# EAGLE board PCM63 (EAGLE 4.11)
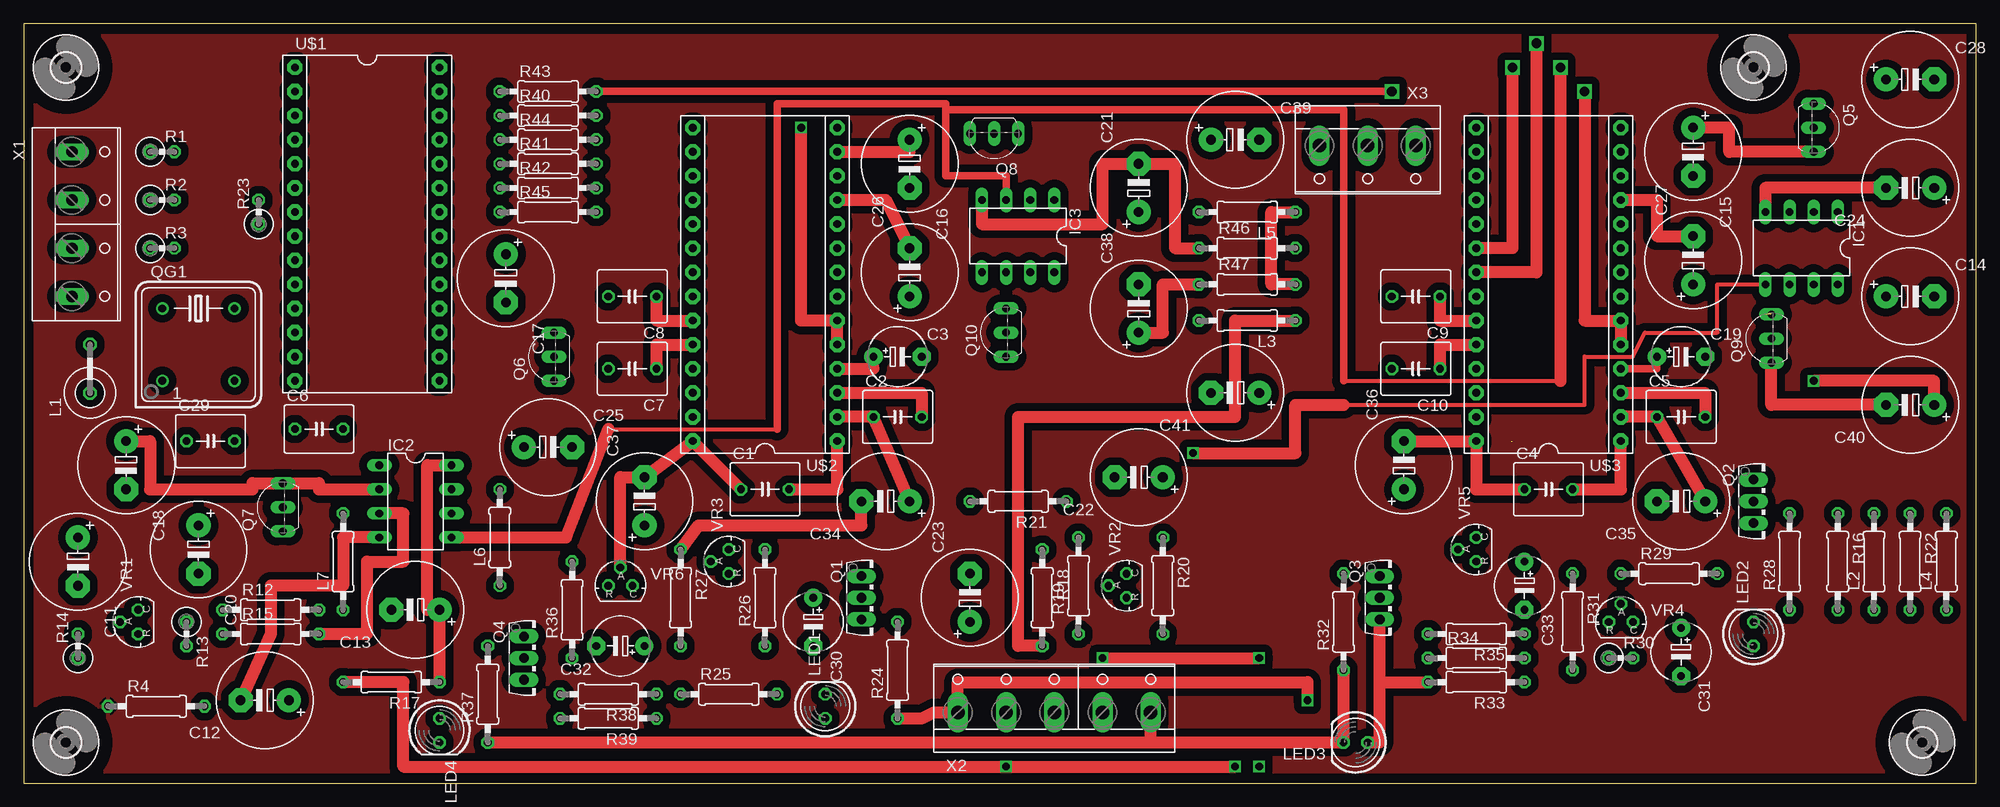
[diagram p0: board, top side]
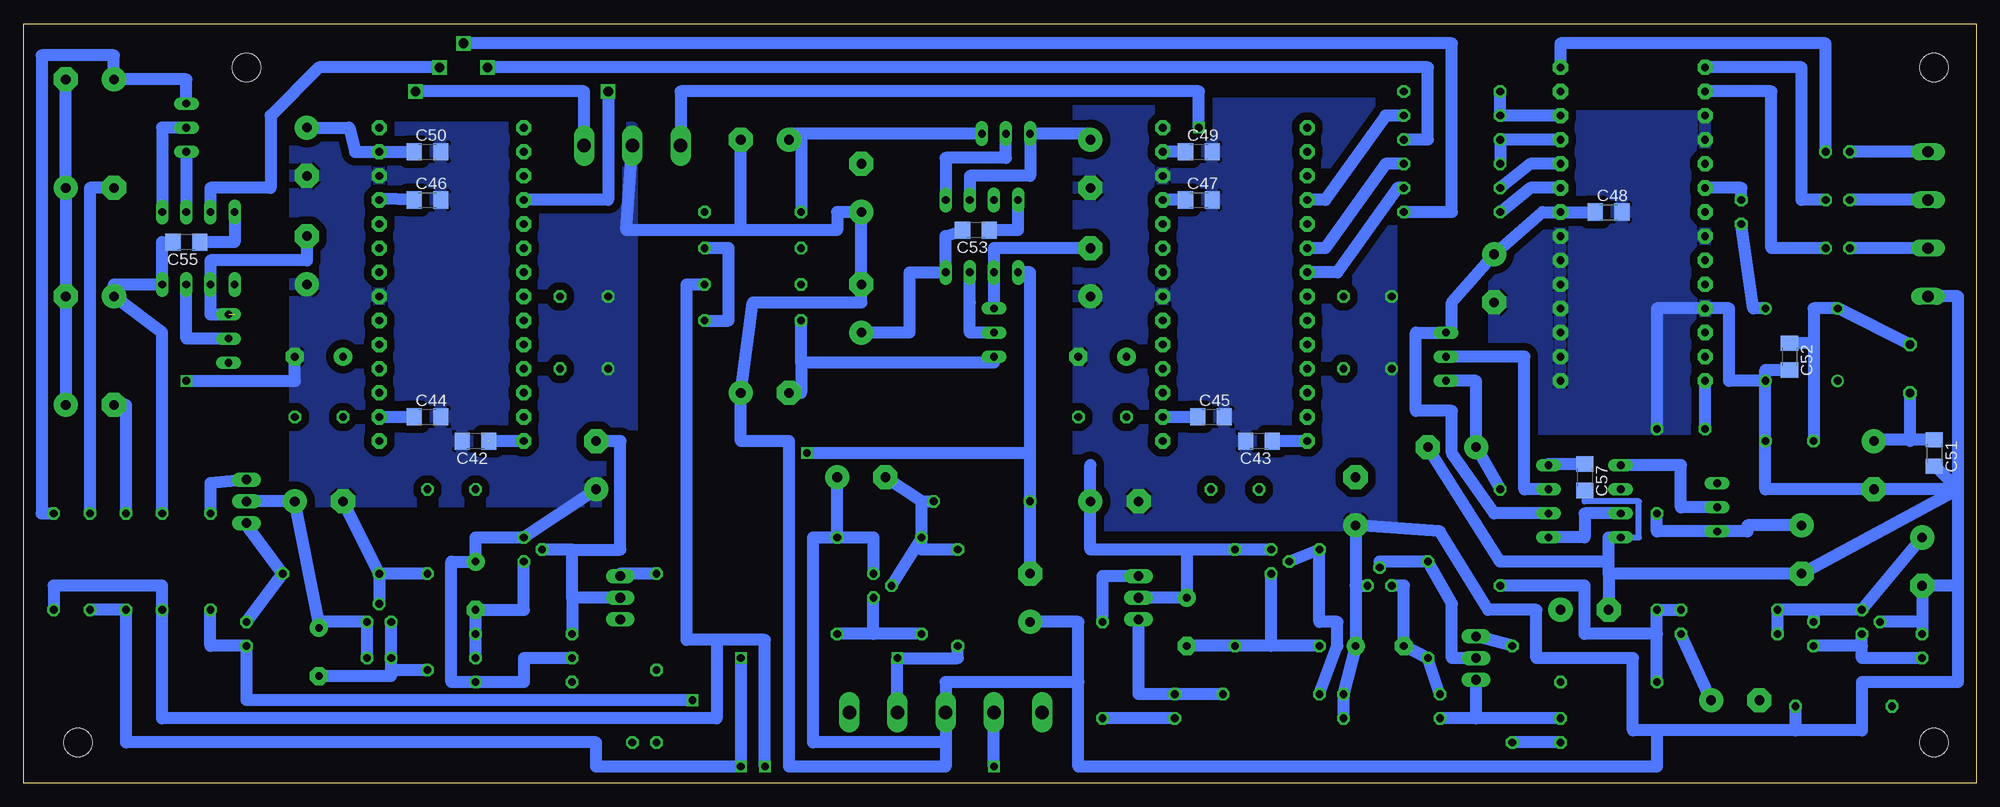
[diagram p1: board, bottom side, seen from below]

Size 205.72 x 80 mm. Coordinates in mm from the lower left corner, seen from the top.
Outline: 0,0 205.72,0 205.72,80 0,80 0,0
Copper layers (1*16): Top 0.035mm / dielectric 1.5mm / Bottom 0.035mm
Design rules "default": minimum track width 10mil, minimum drill 24mil, track to track 8mil, track to pad 8mil, pad to pad 8mil, via to via 8mil, smd to smd 8mil, copper to edge 40mil, drill to drill 8mil, minimum pad ring 10mil, minimum via ring 8mil, stop-mask expansion 4mil, vias tented up to drill 0mil, thermal gap 10mil

## Footprints (pad centres in the part's own frame; a part is rotated, then mirrored left to right if it is on the bottom)
C050-055X075 = drill 0.813 octagon: 1 -2.54,0; 2 2.54,0
E5-6 = drill 0.813 pad 1.905 round: + -2.54,0 | drill 0.813 pad 1.905 octagon: - 2.54,0
C050-050X075 = drill 0.813 octagon: 1 -2.54,0; 2 2.54,0
E5-10,5 = drill 1.016 pad 2.54 round: + -2.54,0 | drill 1.016 pad 2.54 octagon: - 2.54,0
C1206 = smd 1.6 x 1.8: 1 -1.4,0; 2 1.4,0
3,0 = hole 3: 0,0
DIL08 = drill 0.813 long: 1 -3.81,-3.81; 2 -1.27,-3.81; 3 1.27,-3.81; 4 3.81,-3.81; 5 3.81,3.81; 6 1.27,3.81; 7 -1.27,3.81; 8 -3.81,3.81
LBC-SE = drill 0.914 octagon: 1 -2.54,0; 2 2.54,0
0207/10 = drill 0.813 octagon: 1 -5.08,0; 2 5.08,0
LED5MM = drill 0.813 octagon: A -1.27,0; K 1.27,0
TO126AV = drill 1.016 long: B 2.286,-1.27; C 0,-1.27; E -2.286,-1.27
TO92-EBC = drill 0.813 long: B 0,-1.27; C -2.54,-1.27; E 2.54,-1.27
DIL08S = drill 0.813 round: 1 -3.81,-3.81; 4 3.81,-3.81; 5 3.81,3.81; 8 -3.81,3.81
0309V = drill 0.813 octagon: 1 -1.27,0; 2 1.27,0
DIL28 = drill 0.813 pad 1.6 octagon: 1 -16.51,-7.62; 2 -13.97,-7.62; 3 -11.43,-7.62; 4 -8.89,-7.62; 5 -6.35,-7.62; 6 -3.81,-7.62; 7 -1.27,-7.62; 8 1.27,-7.62; 9 3.81,-7.62; 10 6.35,-7.62; 11 8.89,-7.62; 12 11.43,-7.62; 13 13.97,-7.62; 14 16.51,-7.62; 15 16.51,7.62; 16 13.97,7.62; 17 11.43,7.62; 18 8.89,7.62; 19 6.35,7.62; 20 3.81,7.62; 21 1.27,7.62; 22 -1.27,7.62; 23 -3.81,7.62; 24 -6.35,7.62; 25 -8.89,7.62; 26 -11.43,7.62; 27 -13.97,7.62; 28 -16.51,7.62
TO92-CLP = drill 0.813 octagon: A 0,1.905; C 1.27,0; R -1.27,0
W237-4P = drill 1.194 long: 1 -7.62,-0.635; 2 -2.54,-0.635; 3 2.54,-0.635; 4 7.62,-0.635
W237-5P = drill 1.422 long: 1 -10.16,-0.635; 2 -5.08,-0.635; 3 0,-0.635; 4 5.08,-0.635; 5 10.16,-0.635
W237-3E = drill 1.422 long: 1 -5.08,-0.635; 2 0,-0.635; 3 5.08,-0.635

## Placement (x,y rotation side)
C1  470nF  [C050-055X075]  78.1,30.95 0 top
C2  470nF  [C050-055X075]  92.07,38.57 0 top
C3  100uF  [E5-6]  92.07,44.92 0 top
C4  470nF  [C050-055X075]  160.65,30.95 0 top
C5  470nF  [C050-055X075]  174.62,38.57 0 top
C6  100nF  [C050-050X075]  31.11,37.3 0 top
C7  100nF  [C050-055X075]  64.13,43.65 180 top
C8  100nF  [C050-055X075]  64.13,51.27 180 top
C9  100nf  [C050-055X075]  146.68,51.27 180 top
C10  100nf  [C050-055X075]  146.68,43.65 180 top
C11  100uF  [E5-10,5]  5.71,23.33 270 top
C12  100uF  [E5-10,5]  25.39,8.73 180 top
C13  100uF  [E5-10,5]  41.27,18.25 180 top
C14  100uF  [E5-10,5]  198.75,51.27 0 top
C15  100uF  [E5-10,5]  175.89,66.51 270 top
C16  100uF  [E5-10,5]  93.34,65.24 270 top
C17  100nF  [E5-10,5]  50.8,53.17 270 top
C18  100uF  [E5-10,5]  10.79,33.49 270 top
C19  100uF  [E5-6]  174.62,44.92 0 top
C20  100uF  [E5-10,5]  18.41,24.6 270 top
C21  100uF  [E5-10,5]  117.47,62.7 90 top
C22  100uF  [E5-10,5]  117.47,32.22 180 top
C23  100uF  [E5-10,5]  99.69,19.52 90 top
C24  100uF  [E5-10,5]  198.75,62.7 180 top
C25  100uF  [E5-10,5]  55.24,35.39 0 top
C26  100uF  [E5-10,5]  93.34,53.81 90 top
C27  100uF  [E5-10,5]  175.89,55.08 90 top
C28  100uF  [E5-10,5]  198.75,74.13 0 top
C29  100nF  [C050-055X075]  19.68,36.03 0 top
C30  22uF  [E5-6]  83.18,16.98 270 top
C31  22uF  [E5-6]  174.62,13.81 270 top
C32  22uF  [E5-6]  62.86,14.44 180 top
C33  22uF  [E5-6]  158.11,20.79 270 top
C34  100uF  [E5-10,5]  90.8,29.68 180 top
C35  100uF  [E5-10,5]  174.62,29.68 180 top
C36  100uF  [E5-10,5]  145.41,33.49 90 top
C37  100uF  [E5-10,5]  65.4,29.68 90 top
C38  100uF  [E5-10,5]  117.47,50 90 top
C39  100uF  [E5-10,5]  127.63,67.78 0 top
C40  100uF  [E5-10,5]  198.75,39.84 180 top
C41  100uF  [E5-10,5]  127.63,41.11 180 top
C42  4.7uF  [C1206]  158.11,36.03 180 bottom
C43  4.7uF  [C1206]  75.56,36.03 180 bottom
C44  4.7uF  [C1206]  163.19,38.57 0 bottom
C45  4.7uF  [C1206]  80.64,38.57 0 bottom
C46  4.7uF  [C1206]  163.19,61.43 0 bottom
C47  4.7uF  [C1206]  81.91,61.43 0 bottom
C48  4.7uF  [C1206]  38.73,60.16 0 bottom
C49  4.7uF  [C1206]  81.91,66.51 0 bottom
C50  4.7uF  [C1206]  163.19,66.51 0 bottom
C51  4.7uF  [C1206]  4.44,34.76 270 bottom
C52  4.7uF  [C1206]  19.68,44.92 270 bottom
C53  4.7uF  [C1206]  105.41,58.25 180 bottom
C55  4.7uF  [C1206]  188.59,56.98 180 bottom
C57  4.7uF  [C1206]  41.27,32.22 270 bottom
H1  MOUNT-HOLE3.0  [3,0]  4.44,75.4 0 top
H2  MOUNT-HOLE3.0  [3,0]  182.24,75.4 0 top
H3  MOUNT-HOLE3.0  [3,0]  200.02,4.28 0 top
H4  MOUNT-HOLE3.0  [3,0]  4.44,4.28 0 top
IC1  OPA2604  [DIL08]  187.32,56.35 180 top
IC2  OPA2604  [DIL08]  41.27,29.68 270 top
IC3  OPA2604  [DIL08]  104.77,57.62 180 top
L1  LBC-SE  [LBC-SE]  6.98,43.65 90 top
L2  2.2mH  [0207/10]  194.94,23.33 90 top
L3  2.2mH  [0207/10]  128.9,48.73 180 top
L4  2.2mH  [0207/10]  202.56,23.33 90 top
L5  2.2mH  [0207/10]  128.9,60.16 180 top
L6  2.2mH  [0207/10]  50.16,25.87 90 top
L7  2.2mH  [0207/10]  33.65,23.33 90 top
LED1  [LED5MM]  84.45,8.09 90 top
LED2  [LED5MM]  182.24,15.71 90 top
LED3  [LED5MM]  140.33,4.28 180 top
LED4  [LED5MM]  43.81,5.55 270 top
Q1  BD140  [TO126AV]  89.53,19.52 270 top
Q2  BD140  [TO126AV]  183.51,29.68 270 top
Q3  BD139  [TO126AV]  144.14,19.52 270 top
Q4  BD139  [TO126AV]  53.97,13.17 270 top
Q5  BC550C  [TO92-EBC]  189.86,69.05 270 top
Q6  BC550C  [TO92-EBC]  54.61,44.92 90 top
Q7  BC550C  [TO92-EBC]  26.03,29.04 90 top
Q8  BC550C  [TO92-EBC]  102.23,67.14 180 top
Q9  BC560  [TO92-EBC]  182.88,46.82 90 top
Q10  BC560  [TO92-EBC]  102.23,47.46 90 top
QG1  11.2896Mhz  [DIL08S]  18.41,46.19 0 top
R1  47  [0309V]  14.6,66.51 0 top
R2  47  [0309V]  14.6,61.43 0 top
R3  47  [0309V]  14.6,56.35 0 top
R4  0  [0207/10]  13.97,8.09 0 top
R12  220  [0207/10]  26.03,18.25 0 top
R13  1k  [0309V]  17.14,15.71 270 top
R14  1k  [0309V]  5.71,14.44 90 top
R15  470  [0207/10]  26.03,15.71 0 top
R16  100  [0207/10]  191.13,23.33 270 top
R17  100  [0207/10]  38.73,10.63 180 top
R18  220  [0207/10]  107.31,19.52 270 top
R19  1k  [0207/10]  111.12,20.79 90 top
R20  1k  [0207/10]  120.01,20.79 270 top
R21  470  [0207/10]  104.77,29.68 180 top
R22  100  [0207/10]  198.75,23.33 270 top
R23  47  [0309V]  24.76,60.16 90 top
R24  20  [0207/10]  92.07,11.9 90 top
R25  470  [0207/10]  74.29,9.36 0 top
R26  1k  [0207/10]  78.1,19.52 90 top
R27  1k  [0207/10]  69.21,19.52 270 top
R28  20  [0207/10]  186.05,23.33 90 top
R29  470  [0207/10]  173.35,22.06 0 top
R30  1k  [0309V]  168.27,13.17 0 top
R31  1k  [0207/10]  163.19,16.98 270 top
R32  20  [0207/10]  139.06,16.98 90 top
R33  470  [0207/10]  153.03,10.63 180 top
R34  1k  [0207/10]  153.03,13.17 0 top
R35  1k  [0207/10]  153.03,15.71 180 top
R36  1k  [0207/10]  57.78,18.25 90 top
R37  20  [0207/10]  48.89,9.36 90 top
R38  1k  [0207/10]  61.59,9.36 180 top
R39  470  [0207/10]  61.59,6.82 180 top
R40  47  [0207/10]  55.24,70.32 0 top
R41  47  [0207/10]  55.24,65.24 0 top
R42  47  [0207/10]  55.24,62.7 0 top
R43  47  [0207/10]  55.24,72.86 0 top
R44  47  [0207/10]  55.24,67.78 0 top
R45  47  [0207/10]  55.24,60.16 0 top
R46  100  [0207/10]  128.9,56.35 0 top
R47  100  [0207/10]  128.9,52.54 0 top
U$1  SM5842  [DIL28]  36.19,58.89 270 top
U$2  PCM63  [DIL28]  78.1,52.54 90 top
U$3  PCM63  [DIL28]  160.65,52.54 90 top
VR1  [TO92-CLP]  12.06,16.98 90 top
VR2  [TO92-CLP]  116.2,20.79 90 top
VR3  [TO92-CLP]  74.29,23.33 90 top
VR4  [TO92-CLP]  168.27,16.98 0 top
VR5  [TO92-CLP]  153.03,24.6 90 top
VR6  [TO92-CLP]  62.86,20.79 0 top
X1  [W237-4P]  5.71,58.89 270 top
X2  [W237-5P]  108.58,8.09 0 top
X3  [W237-3E]  141.6,66.51 180 top

## Library data of the parts
C1-C53 C55 C57 L2-L7 R1-R4 R12-R47 = rcl
H1-H4 = holes
IC1-IC3 = linear
L1 = inductors
LED1-LED4 = led
Q1-Q4 = transistor-power
Q5-Q8 = transistor-npn
Q9 Q10 = transistor-pnp
QG1 = crystal
U$1-U$3 = burr-brown
VR1-VR6 = v-reg
X1-X3 = con-wago-508

## Nets
+5V: C12.+ IC1.3 IC2.3 IC2.5 IC3.3 R15.2
+5V/1: C15.+ C50.1 IC1.2 Q5.E U$3.13
+5V/2: C16.+ C49.1 IC3.2 Q8.E U$2.13
+5V/3: C17.+ C48.1 IC2.6 Q6.E U$1.22
+5V/4: C29.1 C52.1 L1.2 QG1.8
-5V: C23.- IC1.5 IC3.5 R21.2
DGND: R4.1
GND: C3.- C6.2 C7.2 C8.2 C9.2 C10.2 C11.- C12.- C13.- C14.- C15.- C16.- C17.- C18.- C19.- C20.- C21.+ C22.+ C23.+ C24.+ C25.- C26.+ C27.+ C28.- C29.2 C32.+ C33.+ C34.- C35.- C36.+ C37.+ C38.- C39.- C40.+ C41.+ C42.2 C43.2 C44.2 C45.2 C46.2 C47.2 C48.2 C49.2 C50.2 C51.2 C52.2 C57.2 IC2.4 QG1.4 R4.2 R14.2 R20.1 R25.1 R27.1 R29.1 R31.1 R33.1 R34.1 R38.1 R39.1 U$1.3 U$1.4 U$1.8 U$1.11 U$1.15 U$1.16 U$1.17 U$1.18 U$1.19 U$1.20 U$1.21 U$2.7 U$2.12 U$3.7 U$3.12 VR1.A VR2.C VR3.A VR4.A VR5.C VR6.C X1.4 X2.3 X3.2
N$1: R40.1 R43.1 U$1.26
N$2: R41.1 R44.1 U$1.25
N$3: R42.1 U$1.24
N$4: R45.1 U$1.23
N$5: C4.1 C36.- C42.1 Q3.C R35.2 U$3.28 VR5.A
N$6: C4.2 U$3.1
N$7: C5.2 U$3.3
N$8: C19.+ U$3.4
N$9: C3.+ U$2.4
N$10: C2.2 U$2.3
N$11: C1.2 U$2.1
N$12: C1.1 C37.- C43.1 Q4.C R36.2 U$2.28 VR6.A
N$13: C2.1 C30.+ C34.+ C45.1 Q1.C R26.2 U$2.2 VR3.C
N$14: C5.1 C31.+ C35.+ C44.1 Q2.C R30.2 U$3.2 VR4.C
N$15: C22.- R18.1 R19.2 R21.1 VR2.A
N$16: R1.2 U$1.28
N$17: R2.2 U$1.1
N$18: R3.2 U$1.2
N$19: R1.1 X1.1
N$20: R2.1 X1.2
N$21: R3.1 X1.3
N$22: R23.2 U$1.6
N$23: C20.+ L7.2 Q7.C
N$24: C6.1 U$1.14
N$25: C25.+ L6.2 Q6.C
N$26: C39.+ L5.2 Q8.C
N$27: C10.1 U$3.24
N$28: C8.1 U$2.23
N$29: C7.1 U$2.24
N$30: C28.+ L4.2 Q5.C
N$31: C41.- L3.2 Q10.C
N$32: C40.- L2.2 Q9.C
N$33: C9.1 U$3.23
N$36: U$2.5 U$2.6 X3.3
N$37: U$3.5 U$3.6 X3.1
N$38: R13.2 R14.1 VR1.R
N$39: C11.+ R12.1 R13.1 R15.1 VR1.C
N$40: R19.1 R20.2 VR2.R
N$41: IC3.7 Q10.B
N$42: C13.+ C57.1 IC2.8 R17.1
N$43: C27.- C46.1 IC1.6 Q9.E U$3.11
N$44: C14.+ C55.2 IC1.8 R16.1
N$45: IC1.1 Q5.B
N$46: C24.- C55.1 IC1.4 R22.1
N$47: IC1.7 Q9.B
N$48: C26.- C47.1 IC3.6 Q10.E U$2.11
N$49: IC3.1 Q8.B
N$50: QG1.5 R23.1
N$51: IC2.7 Q6.B
N$52: C18.+ C51.1 IC2.2 L1.1 Q7.E
N$53: Q1.E R24.2
N$54: IC2.1 Q7.B
N$55: LED1.K Q1.B R25.2
N$56: Q2.E R28.2
N$57: C30.- R26.1 R27.2 VR3.R
N$58: Q3.E R32.2
N$59: LED2.K Q2.B R29.2
N$60: LED3.A Q3.B R33.2
N$61: C31.- R30.1 R31.2 VR4.R
N$62: Q4.E R37.2
N$63: C33.- R34.2 R35.1 VR5.R
N$64: LED4.A Q4.B R39.2
N$65: R40.2 U$2.18
N$66: C32.- R36.1 R38.2 VR6.R
N$67: R41.2 U$2.20
N$68: R42.2 U$2.21
N$69: R43.2 U$3.18
N$70: R44.2 U$3.20
N$71: R45.2 U$3.21
N$72: C38.+ C53.2 IC3.8 R47.1
N$73: C21.- C53.1 IC3.4 R46.1
V+: LED1.A LED2.A R24.1 R28.1 X2.1
V-: LED3.K LED4.K R32.1 R37.1 X2.5
VDD: L4.1 L5.1 L6.1 L7.1 R12.2 R16.2 R17.2 R47.2 X2.2
VEE: L2.1 L3.1 R18.2 R22.2 R46.2 X2.4

## Tracks (layer width: path | path; a pad name or v marks a point on that pad's centre or on a via)
+5V  (via drill 1.02)
  Top 0.406: 61.59,37.3 79.37,37.3 | 139.06,42.38 161.92,42.38
  Top 0.813: 79.37,37.3 79.37,71.59 97.15,71.59 97.15,70.95 | IC3.3 103.5,63.97 97.15,63.97 97.15,70.95 | 97.15,70.95 139.06,70.95 139.06,42.38
  Top 1.27: 161.92,42.38 v161.92,75.4 | R15.2 36.19,15.71 36.19,23.33 40,23.33 40,28.41 IC2.3 | IC2.5 57.15,25.87 61.59,37.3
  Bottom 1.27: IC2.3 41.27,28.41 41.27,25.87 IC2.5 | C12.+ R15.2 | IC1.3 186.05,62.7 179.7,62.7 179.7,70.32 174.62,75.4 v161.92,75.4
+5V/1
  Top 1.27: Q5.E 179.7,66.51 179.7,69.05 C15.+
  Bottom 1.27: 164.46,66.51 C50.1 U$3.13 170.81,66.51 171.44,69.05 C15.+ | Q5.E IC1.2
+5V/2
  Top 1.27: U$2.13 93.34,66.51 C16.+
  Bottom 1.27: IC3.2 106.04,63.97 99.69,63.97 Q8.E 93.34,68.41 C16.+ | 85.85,66.64 U$2.13 C49.1
+5V/3
  Bottom 1.27: C48.1 U$1.22 45.72,60.16 C17.+ 55.24,50.63 55.24,47.46 Q6.E 59.05,47.46 59.05,39.2 55.24,39.2 55.24,34.76 50.8,28.41 IC2.6
+5V/4
  Bottom 1.27: 17.14,46.32 C52.1 | 17.14,46.32 17.14,50 QG1.8 L1.2 | 17.14,46.32 C29.1
-5V  (via drill 0.81)
  Top 0.406: IC1.5 178.43,52.54 178.43,47.46 170.81,47.46 169.54,44.92 164.46,44.92 164.46,39.84 139.06,39.84
  Top 1.27: v123.19,34.76 133.98,34.76 133.98,39.84 139.06,39.84
  Bottom 1.27: C23.- R21.2 99.69,34.76 | 99.69,34.76 99.69,53.81 IC3.5 | 99.69,34.76 v123.19,34.76
DGND
  pour Top (isolate 0.813): 0.63,79.21 205.1,79.21 205.1,0.47 0.63,0.47
GND  (via drill 0.81)
  Top 1.27: IC2.4 33.65,25.87 33.65,20.79 26.03,20.79 26.03,15.71 C12.- | C34.- 88.26,27.14 71.11,27.14 R27.1 | C40.+ 201.29,42.38 v188.59,42.38
  Bottom 0.61: C57.2 41.27,29.68 35.55,29.68 35.55,25.87 IC2.4
  Bottom 1.27: QG1.4 C29.2 22.22,30.95 C18.- 1.9,30.95 | IC2.4 38.73,25.87 38.73,23.33 | 38.73,22.06 38.73,23.33 | 38.73,22.06 C13.- | 5.71,16.98 R14.2 | 5.71,16.98 C11.- 1.9,20.79 | X1.4 1.9,51.27 1.9,30.95 | 1.9,20.79 1.9,30.95 | C25.- 50.16,23.33 38.73,23.33 | 5.71,16.98 VR1.A | 38.73,22.06 C20.- 1.9,30.95 | 1.9,20.79 1.9,10.63 12.06,10.63 12.06,5.55 19.04,5.55 | 19.04,5.55 33.65,5.55 | 33.65,5.55 36.19,5.55 36.19,13.17 46.35,13.17 46.35,18.25 51.43,18.25 56.51,26.5 C37.+ 65.4,20.79 | 130.17,58.25 120.01,58.25 120.01,60.16 C21.+ C38.- 117.47,50.63 128.9,50.63 C41.+ 130.17,36.03 125.09,36.03 125.09,1.74 108.58,1.74 108.58,4.28 | 108.58,10.63 X2.3 | 94.61,10.63 108.58,10.63 | 94.61,10.63 94.61,1.74 33.65,1.74 33.65,5.55 | C23.+ 94.61,16.98 94.61,10.63 | 130.17,58.25 C39.- | 130.17,58.25 142.23,58.25 X3.2 | 108.58,10.63 108.58,4.28 | 108.58,4.28 122.55,4.28 122.55,25.87 R20.1 | C40.+ C14.- C24.+ C28.- | v188.59,42.38 177.16,42.38 C19.- | C52.2 22.22,43.52 QG1.4 | C51.2 4.31,33.36 1.9,30.95 | 19.04,5.55 R4.2 | 65.4,20.79 VR6.C | 65.4,20.79 C32.+ R38.1 R39.1 | C6.2 33.65,50 U$1.11 26.03,50 26.03,42.38 QG1.4 | R25.1 67.3,14.44 67.3,16.98 69.21,16.98 R27.1 VR3.A | R20.1 C22.+ | R20.1 116.2,25.87 VR2.C | R34.1 153.03,13.17 153.03,10.63 R33.1 160.65,10.63 160.65,23.33 C33.+ 158.11,25.87 VR5.C C36.+ | R29.1 R31.1 R29.1 | R29.1 VR4.A | R29.1 C35.-
  pour Bottom (isolate 0.813): 28.57,70.32 28.57,37.3 50.8,37.3 50.8,70.32
  pour Bottom (isolate 0.813): 61.59,71.59 94.61,71.59 94.61,27.14 61.59,27.14
  pour Bottom (isolate 0.813): 141.6,69.05 177.16,69.05 177.16,29.68 141.6,29.68
N$1
  Bottom 1.27: U$1.26 R40.1 R43.1
N$2
  Bottom 1.27: U$1.25 R44.1 R41.1
N$3
  Bottom 1.27: U$1.24 46.98,65.24 R42.1
N$4
  Bottom 1.27: U$1.23 46.98,62.7 R45.1
N$5  (1 unrouted)
  Top 1.27: C36.- U$3.28 153.03,30.95 C4.1
  Bottom 1.27: U$3.28 156.84,36.03 | 147.95,19.52 R35.2 | Q3.C 147.95,19.52 | 147.95,19.52 147.95,24.6 | C36.- 142.87,36.03 142.87,24.6 147.95,24.6 | 147.95,24.6 VR5.A
N$6
  Top 1.27: C4.2 168.27,30.95 U$3.1
N$7
  Top 1.27: U$3.3 177.16,41.11 C5.2
N$8
  Top 0.813: U$3.4 172.08,43.65 C19.+
N$9
  Top 1.27: U$2.4 89.53,43.65 C3.+
N$10
  Top 1.27: U$2.3 94.61,41.11 C2.2
N$11
  Top 1.27: C1.2 85.72,30.95 U$2.1
N$12
  Top 1.27: VR6.A 62.86,23.33 62.86,32.22 C37.- U$2.28 C1.1
  Bottom 1.27: U$2.28 C43.1 | Q4.C 55.24,13.17 55.24,18.88 R36.2 62.86,23.33 VR6.A
N$13
  Top 1.27: U$2.2 C2.1 C34.+
  Bottom 1.27: 93.34,33.49 C34.+ 93.34,24.6 83.18,24.6 | U$2.2 C45.1 | VR3.C R26.2 83.18,24.6 | 83.18,24.6 C30.+ Q1.C
N$14
  Top 1.27: U$3.2 C5.1 C35.+
  Bottom 1.27: U$3.2 C44.1 | R30.2 VR4.C 174.62,16.98 | 174.62,16.98 C31.+ | 174.62,16.98 C35.+ Q2.C
N$15
  Bottom 1.27: R18.1 111.12,24.6 R19.2 | R19.2 VR2.A | 111.12,29.68 R21.1 | R19.2 111.12,29.68 | 111.12,29.68 C22.-
N$16
  Bottom 1.27: R1.2 15.87,77.94 43.81,77.94 U$1.28
N$17
  Bottom 1.27: R2.2 18.41,61.43 18.41,75.4 U$1.1
N$18
  Bottom 1.27: R3.2 21.58,56.35 21.58,72.86 U$1.2
N$19
  Bottom 1.27: X1.1 R1.1
N$20
  Bottom 1.27: X1.2 R2.1
N$21
  Bottom 1.27: X1.3 R3.1
N$22
  Bottom 1.27: R23.2 24.76,62.7 U$1.6
N$23
  Bottom 1.27: C20.+ 24.12,27.14 24.12,26.5 Q7.C 33.65,26.5 L7.2
N$24
  Bottom 1.27: C6.1 U$1.14
N$25
  Bottom 1.27: L6.2 C25.+ 52.7,42.38 Q6.C
N$26
  Bottom 1.27: L5.2 123.82,67.78 C39.+ 125.09,68.41 Q8.C
N$27
  Top 1.27: U$3.24 149.22,46.19 C10.1
N$28
  Top 1.27: C8.1 66.67,48.73 U$2.23
N$29
  Top 1.27: C7.1 66.67,46.19 U$2.24
N$30
  Bottom 1.27: L4.2 203.83,28.41 203.83,76.67 196.21,76.67 C28.+ 188.59,74.13 Q5.C
N$31
  Bottom 1.27: C41.- 123.82,41.11 123.82,44.28 | 123.82,44.28 L3.2 | Q10.C 103.5,44.28 123.82,44.28
N$32
  Top 1.27: Q9.C 184.14,39.84 C40.-
  Bottom 1.27: L2.2 194.94,39.84 C40.-
N$33
  Top 1.27: U$3.23 149.22,48.73 C9.1
N$36  (via drill 0.81)
  Top 1.27: U$2.5 U$2.6 81.91,48.73 v81.91,69.05
  Bottom 1.27: X3.3 136.52,72.86 81.91,72.86 v81.91,69.05
N$37  (via drill 1.02)
  Top 1.27: U$3.5 U$3.6 164.46,48.73 v164.46,72.86
  Bottom 1.27: X3.1 146.68,72.86 v164.46,72.86
N$38
  Bottom 1.27: R14.1 12.06,13.17 12.06,14.44 | 12.06,14.44 VR1.R | 12.06,14.44 R13.2
N$39
  Bottom 1.27: C11.+ VR1.C 17.14,18.25 | 17.14,18.25 R13.1 | 17.14,18.25 R12.1 R15.1
N$40
  Bottom 1.27: R19.1 116.2,15.71 | 116.2,15.71 R20.2 | 116.2,15.71 VR2.R
N$41
  Bottom 1.27: IC3.7 106.04,50.63 106.04,47.46 Q10.B
N$42
  Top 1.27: IC2.8 42.54,33.49 42.54,18.25 C13.+ R17.1
  Bottom 1.27: C57.1 45.08,33.62 IC2.8
N$43  (1 unrouted)
  Top 1.27: U$3.11 172.08,61.43 172.08,57.62 C27.-
  Bottom 1.27: 168.4,61.56 U$3.11 168.14,61.56 C46.1 | 183.51,49.37 186.05,49.37 IC1.6 186.05,55.08 175.89,55.08 C27.-
N$44
  Bottom 1.27: R16.1 191.13,47.46 C14.+ 196.21,52.54 IC1.8 191.13,56.98 C55.2
N$45
  Bottom 1.27: Q5.B 191.13,69.05 IC1.1
N$46
  Top 1.27: IC1.4 183.51,62.7 C24.-
  Bottom 1.27: C24.- 198.75,62.7 R22.1 | IC1.4 183.51,56.98 C55.1
N$47
  Bottom 1.27: Q9.B 188.59,46.82 IC1.7
N$48
  Top 1.27: U$2.11 90.8,61.43 C26.-
  Bottom 1.27: C47.1 U$2.11 | C26.- 103.5,56.35 IC3.6 Q10.E
N$49
  Bottom 1.27: Q8.B 102.23,65.88 108.58,65.88 IC3.1
N$50
  Bottom 1.27: QG1.5 23.49,50 R23.1
N$51
  Bottom 1.27: IC2.7 47.62,30.95 47.62,44.92 Q6.B
N$52
  Top 1.27: C18.+ 13.33,36.03 13.33,30.95 24.12,30.95 24.12,31.58 Q7.E 31.11,31.58 31.11,30.95 IC2.2
  Bottom 1.27: C51.1 6.98,36.16 | 6.98,36.16 10.66,36.16 C18.+ | 6.98,36.16 6.98,36.03 | 6.98,36.16 L1.1
N$53
  Bottom 1.27: Q1.E 92.07,21.81 R24.2
N$54
  Bottom 1.27: IC2.1 31.11,33.49 31.11,29.04 Q7.B
N$55
  Bottom 1.27: Q1.B 88.26,9.36 LED1.K R25.2
N$56
  Bottom 1.27: Q2.E 186.05,31.58 R28.2
N$57
  Bottom 1.27: R27.2 74.29,14.44 | 74.29,14.44 R26.1 C30.- | 74.29,14.44 VR3.R
N$58
  Bottom 1.27: Q3.E 142.87,22.06 R32.2
N$59
  Bottom 1.27: LED2.K R29.2 182.24,27.14 Q2.B
N$60
  Top 1.27: 142.87,10.63 Q3.B | 142.87,10.63 R33.2 | LED3.A 142.87,4.28 142.87,10.63
N$61
  Bottom 1.27: R31.2 167,11.9 | 167,11.9 R30.1 VR4.R | C31.- 167,11.27 167,11.9
N$62
  Bottom 1.27: R37.2 Q4.E
N$63
  Bottom 1.27: R34.2 R35.1 C33.- 153.03,18.25 VR5.R
N$64
  Bottom 1.27: LED4.A 52.7,6.82 | 52.7,6.82 Q4.B | 52.7,6.82 R39.2
N$65
  Bottom 1.27: R40.2 62.23,70.32 68.57,61.43 U$2.18
N$66
  Bottom 1.27: R38.2 R36.1 C32.- 60.32,20.79 VR6.R
N$67
  Bottom 1.27: R41.2 62.23,65.24 68.57,56.35 U$2.20
N$68
  Bottom 1.27: R42.2 60.96,62.7 67.3,53.81 U$2.21
N$69  (via drill 1.02)
  Top 0.813: R43.2 v144.14,72.86
  Bottom 1.27: U$3.18 144.14,61.43 v144.14,72.86
N$70  (via drill 1.02)
  Top 1.27: v156.84,75.4 156.84,56.35 U$3.20
  Bottom 1.27: R44.2 57.78,67.78 57.78,75.4 v156.84,75.4
N$71  (via drill 1.02)
  Top 1.27: v159.38,77.94 159.38,53.81 U$3.21
  Bottom 1.27: v159.38,77.94 55.24,77.94 55.24,60.16 R45.2
N$72
  Top 1.27: C38.+ 120.01,47.46 120.01,52.54 R47.1
  Bottom 1.27: C53.2 108.58,57.62 IC3.8 112.39,53.81 112.39,47.46 C38.+
N$73
  Top 1.27: IC3.4 100.96,58.89 113.66,58.89 113.66,65.24 C21.- 121.28,65.24 121.28,56.35 R46.1
  Bottom 1.27: C53.1 100.96,58.25 IC3.4
V+  (via drill 0.81)
  Top 1.27: R24.1 94.61,6.82 95.88,7.46 X2.1 98.42,10.63 135.25,10.63 v135.25,8.73
  Bottom 1.27: LED1.A R24.1 | v135.25,8.73 182.24,8.73 LED2.A 186.05,14.44 R28.1
V-
  Top 1.27: R32.1 LED3.K 118.74,4.28 | R37.1 118.74,4.28 | 118.74,4.28 X2.5
  Bottom 1.27: LED4.K R37.1
VDD  (via drill 0.81)
  Top 1.27: L5.1 131.44,60.16 131.44,52.54 R47.2 | v127.63,1.74 v103.5,1.74 40,1.74 40,10.63 R17.2
  Bottom 1.27: R17.2 33.65,15.71 | 33.65,15.71 L7.1 R12.2 | L6.1 41.27,20.79 41.27,15.71 33.65,15.71 | X2.2 v103.5,1.74 X2.2 | X2.2 103.5,8.09 | v127.63,1.74 127.63,15.08 132.71,15.08 | 132.71,15.08 132.71,6.82 191.13,6.82 R16.2 191.13,20.79 202.56,20.79 L4.1 | 132.71,15.08 135.88,15.08 135.88,52.54 R47.2
VEE  (via drill 0.81)
  Top 1.27: L3.1 127.63,48.73 127.63,38.57 104.77,38.57 104.77,14.44 R18.2 | v113.66,13.17 v130.17,13.17
  Bottom 1.27: R46.2 131.44,56.35 131.44,48.73 L3.1 | R18.2 107.31,13.17 v113.66,13.17 X2.4 | v130.17,13.17 v130.17,1.74 145.41,1.74 145.41,4.28 194.94,4.28 L2.1 R22.2